# EAGLE board Wall-Switcher (EAGLE 8.4.0)
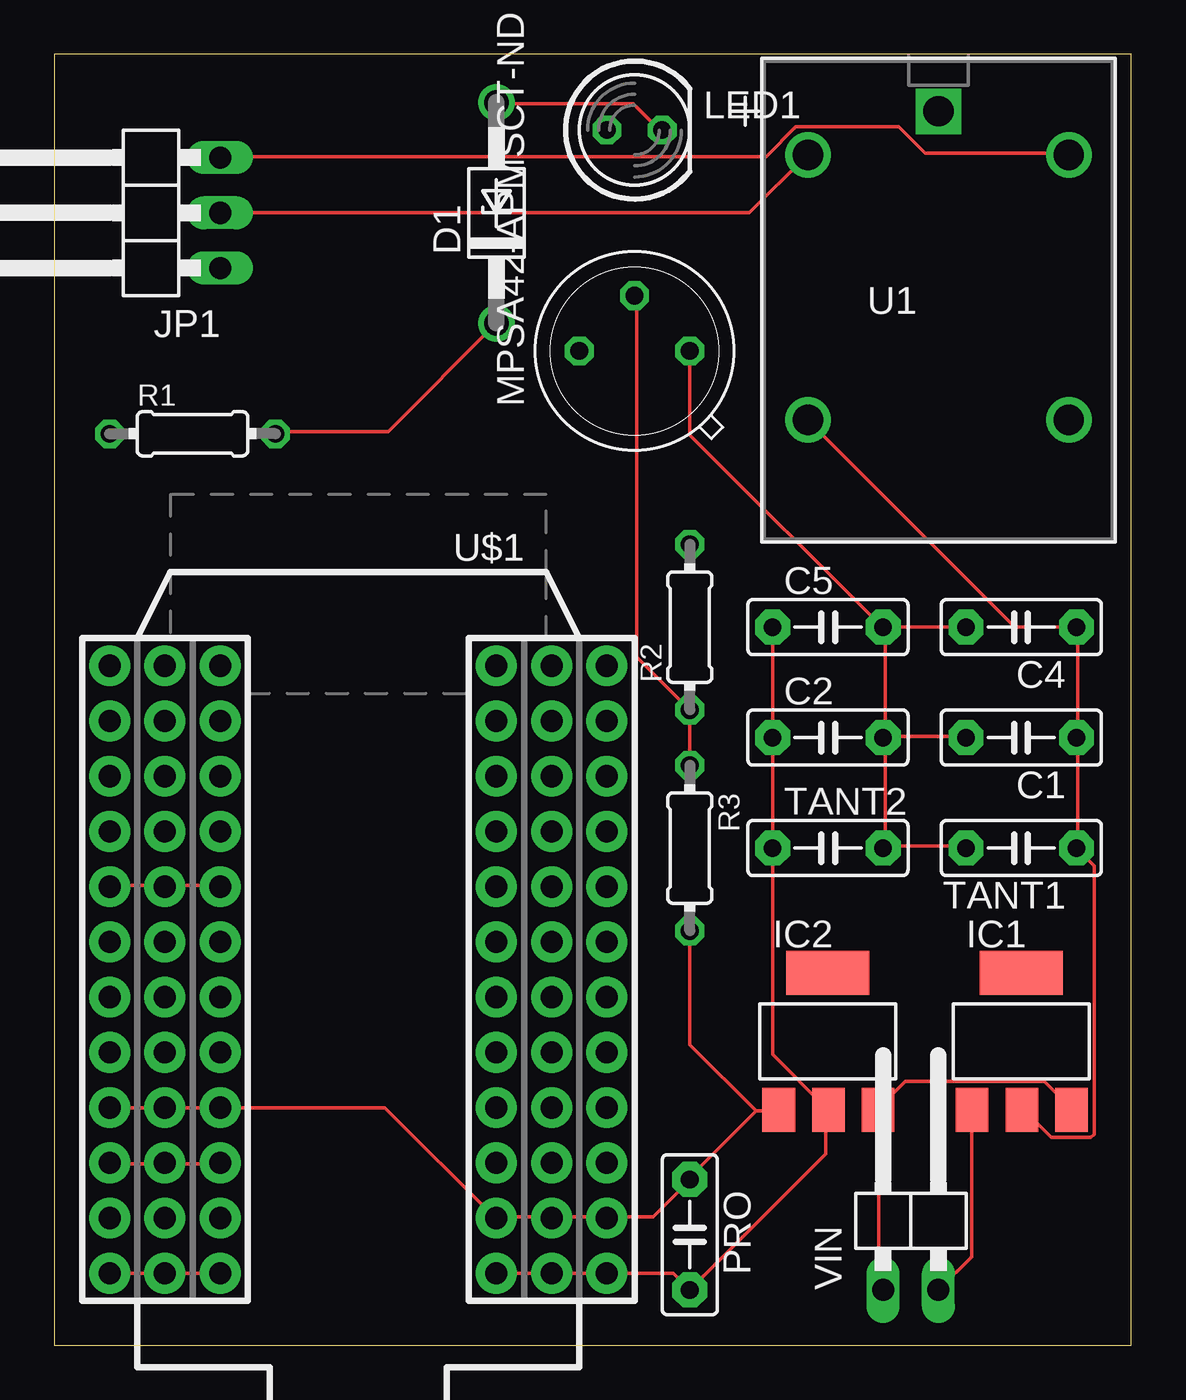
[diagram p0: board, top side]
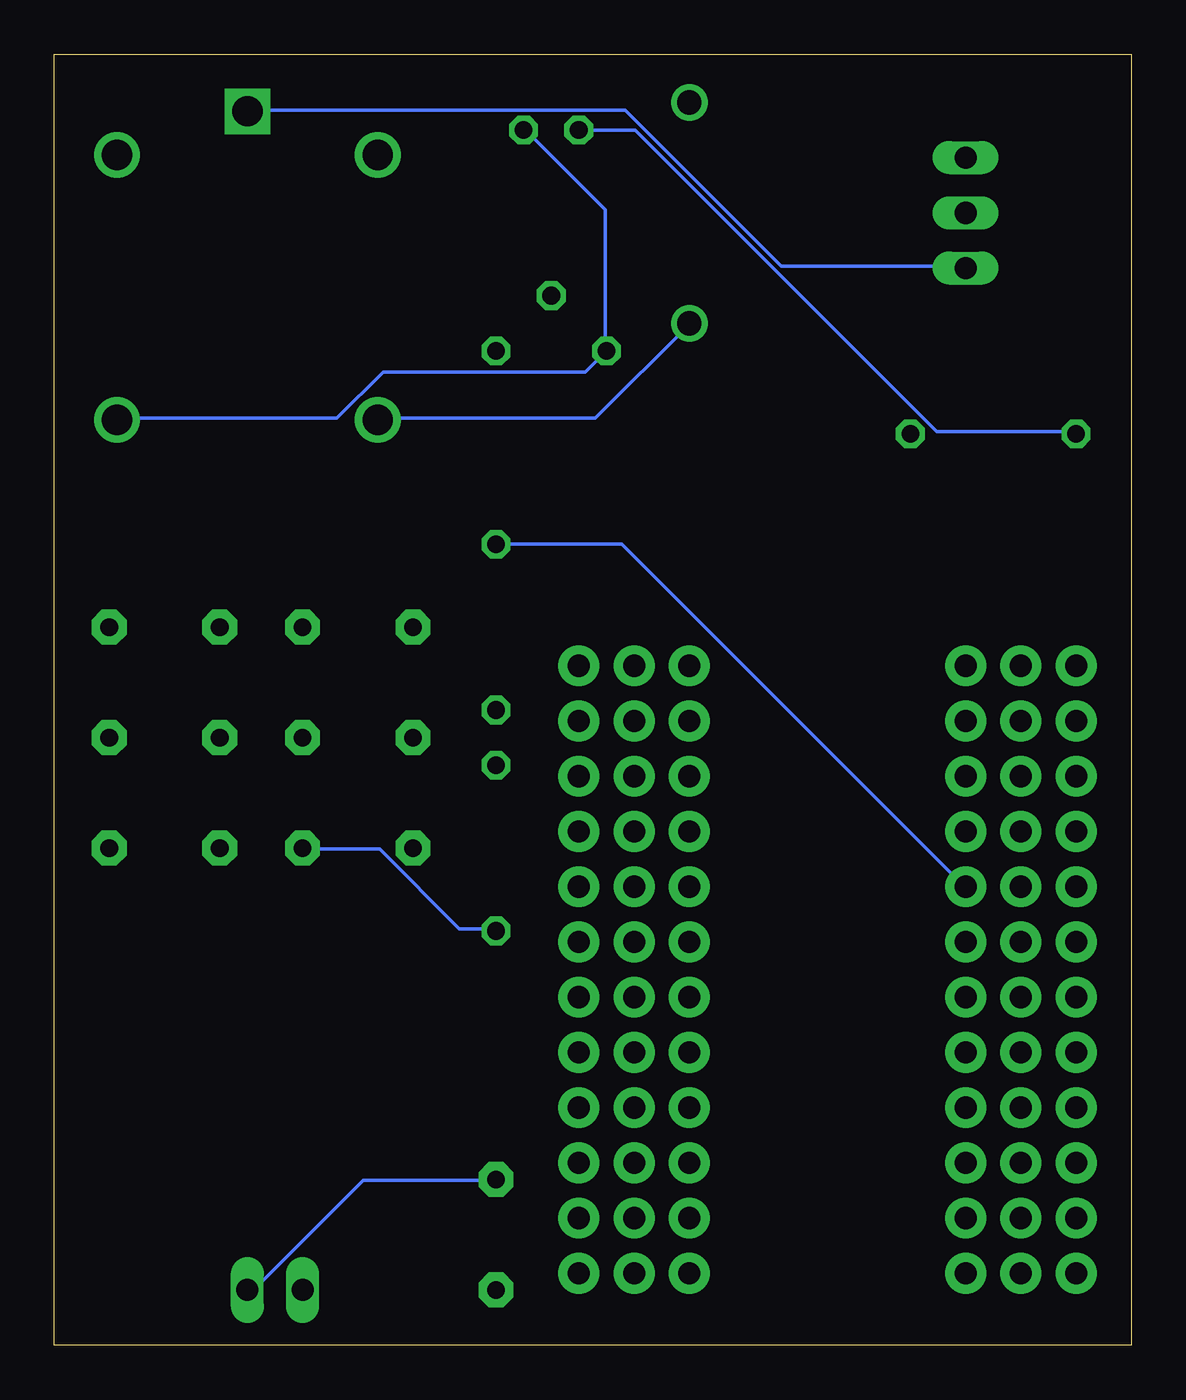
[diagram p1: board, bottom side, seen from below]

Size 49.51 x 59.36 mm. Coordinates in mm from the lower left corner, seen from the top.
Outline: 0,0 49.51,0 49.51,59.36 0,59.36 0,0
Copper layers (1*16): Top 0.035mm / dielectric 1.5mm / Bottom 0.035mm
Design rules "default": minimum track width 6mil, minimum drill 0.35mm, track to track 6mil, track to pad 6mil, pad to pad 6mil, via to via 6mil, smd to smd 6mil, copper to edge 40mil, drill to drill 6mil, minimum pad ring 10mil, minimum via ring 8mil, stop-mask expansion 4mil, vias tented up to drill 0mil, thermal gap 10mil

## Footprints (pad centres in the part's own frame; a part is rotated, then mirrored left to right if it is on the bottom)
C5B2.5 = drill 0.813 pad 1.6 octagon: 1 -2.54,0; 2 2.54,0
DO41Z10 = drill 1.118: A 5.08,0; C -5.08,0
SOT223 = smd 1.499 x 2.007: 1 -2.261,-3.15; 2 0.025,-3.15; 3 2.311,-3.15 | smd 3.81 x 2.007: 4 0,3.15
1X03/90 = drill 1.016 long: 1 -2.54,-3.81; 2 0,-3.81; 3 2.54,-3.81
LED5MM = drill 0.813 octagon: A -1.27,0; K 1.27,0
TO5 = drill 0.813 octagon: 1 0,-2.54; 2 2.54,0; 3 0,2.54
0204/7 = drill 0.813 octagon: 1 -3.81,0; 2 3.81,0
RELAY_JS_1C = drill 1.397 pad 1.905: 1 5.994,15.367; 2 -5.994,3.175; 4 -5.994,15.367; 5 5.994,3.175 | drill 1.397 pad 1.905 square: 3 0,17.374
PHOTON_STACKABLE = drill 1.016 pad 1.88: 1 1.27,32.258; 2 1.27,29.718; 3 1.27,27.178; 4 1.27,24.638; 5 1.27,22.098; 6 1.27,19.558; 7 1.27,17.018; 8 1.27,14.478; 9 1.27,11.938; 10 1.27,9.398; 11 1.27,6.858; 12 1.27,4.318; 13 19.05,4.318; 14 19.05,6.858; 15 19.05,9.398; 16 19.05,11.938; 17 19.05,14.478; 18 19.05,17.018; 19 19.05,19.558; 20 19.05,22.098; 21 19.05,24.638; 22 19.05,27.178; 23 19.05,29.718; 24 19.05,32.258; #1 3.81,32.258; #2 3.81,29.718; #3 3.81,27.178; #4 3.81,24.638; #5 3.81,22.098; #6 3.81,19.558; #7 3.81,17.018; #8 3.81,14.478; #9 3.81,11.938; #10 3.81,9.398; #11 3.81,6.858; #12 3.81,4.318; #13 21.59,4.318; #14 21.59,6.858; #15 21.59,9.398; #16 21.59,11.938; #17 21.59,14.478; #18 21.59,17.018; #19 21.59,19.558; #20 21.59,22.098; #21 21.59,24.638; #22 21.59,27.178; #23 21.59,29.718; #24 21.59,32.258; @1 -1.27,32.258; @2 -1.27,29.718; @3 -1.27,27.178; @4 -1.27,24.638; @5 -1.27,22.098; @6 -1.27,19.558; @7 -1.27,17.018; @8 -1.27,14.478; @9 -1.27,11.938; @10 -1.27,9.398; @11 -1.27,6.858; @12 -1.27,4.318; @13 16.51,4.318; @14 16.51,6.858; @15 16.51,9.398; @16 16.51,11.938; @17 16.51,14.478; @18 16.51,17.018; @19 16.51,19.558; @20 16.51,22.098; @21 16.51,24.638; @22 16.51,27.178; @23 16.51,29.718; @24 16.51,32.258
1X02/90 = drill 1.016 long: 1 -1.27,-3.81; 2 1.27,-3.81

## Placement (x,y rotation side)
C1  .1uf  [C5B2.5]  44.45,27.94 180 top
C2  .1uf  [C5B2.5]  35.56,27.94 0 top
C4  100uf  [C5B2.5]  44.45,33.02 180 top
C5  100uf  [C5B2.5]  35.56,33.02 0 top
D1  1N4728  [DO41Z10]  20.32,52.07 90 top
IC1  REG1117  [SOT223]  44.45,13.97 0 top
IC2  REG1117  [SOT223]  35.56,13.97 0 top
JP1  [1X03/90]  3.81,52.07 90 top
LED1  [LED5MM]  26.67,55.88 0 top
MPSA42-APMSCT-ND  2N1613  [TO5]  26.67,45.72 90 top
PRO  [C5B2.5]  29.21,5.08 270 top
R1  [0204/7]  6.35,41.91 0 top
R2  [0204/7]  29.21,33.02 90 top
R3  [0204/7]  29.21,22.86 270 top
TANT1  [C5B2.5]  44.45,22.86 180 top
TANT2  [C5B2.5]  35.56,22.86 0 top
U1  JS1-5V-F  [RELAY_JS_1C]  40.64,39.37 0 top
U$1  PHOTON_WITH_STACKABLE_HEADERS  [PHOTON_STACKABLE]  24.13,35.56 180 top
VIN  [1X02/90]  39.37,6.35 0 top

## Library data of the parts
C1 C2 C4 C5 PRO TANT1 TANT2 = capacitor-wima
D1 = diode
IC1 IC2 = burr-brown; MPN: REG1117; OC_FARNELL: 1097566; OC_NEWARK: 14P6981
JP1 VIN = pinhead
LED1 = led
MPSA42-APMSCT-ND = transistor
R1-R3 = eagle-ltspice; SPICEMODEL: NONE; SPICEPREFIX: R
U1 = Photon-Power-Relay; MANUFACTURER_PART_NUMBER: JS15VF; VENDOR: Panasonic
U$1 = Spark

## Nets
3V3: U$1.24 U$1.#24 U$1.@24
GND: C1.2 C2.2 C4.2 C5.2 IC1.1 IC2.1 MPSA42-APMSCT-ND.1 PRO.1 R3.2 TANT1.2 TANT2.2 U$1.2 U$1.21 U$1.#2 U$1.#21 U$1.@2 U$1.@21 VIN.2
N$1: D1.A LED1.K MPSA42-APMSCT-ND.3 U1.5
N$2: LED1.A R1.1
N$3: C1.1 C4.1 D1.C IC1.2 R1.2 TANT1.1 U1.2
N$4: R2.2 U$1.17 U$1.#17 U$1.@17
N$5: MPSA42-APMSCT-ND.2 R2.1 R3.1
N$6: C2.1 C5.1 IC2.2 PRO.2 TANT2.1 U$1.1 U$1.#1 U$1.@1
N$7: IC1.3 IC2.3 VIN.1
N$8: JP1.1 U1.3
N$9: JP1.2 U1.4
N$10: JP1.3 U1.1
VBAT: U$1.22 U$1.#22 U$1.@22

## Tracks (layer width: path | path; a pad name or v marks a point on that pad's centre or on a via)
3V3
  Top 0.152: U$1.#24 U$1.24 U$1.@24
GND
  Top 0.152: 38.2,22.96 41.86,22.96 TANT1.2 | 38.2,27.99 41.86,27.99 C1.2 | 38.2,22.96 38.2,27.84 C2.2 38.2,27.99 | 38.2,22.96 TANT2.2 | MPSA42-APMSCT-ND.1 29.21,41.86 38.05,33.02 C5.2 38.2,33.02 | 38.2,33.02 C4.2 | 38.2,33.02 38.2,27.99 | VIN.2 42.16,4.06 42.16,10.77 IC1.1 | U$1.#21 U$1.21 U$1.@21 15.19,10.92 20.22,5.89 U$1.#2 20.37,5.89 22.81,5.89 U$1.2 22.96,5.89 25.4,5.89 | 32.26,10.77 33.17,10.77 IC2.1 | 32.26,10.77 29.21,7.72 PRO.1 29.21,7.57 27.53,5.89 25.4,5.89 | R3.2 29.21,13.82 32.26,10.77 | 25.4,5.89 U$1.@2
  Bottom 0.152: VIN.2 40.33,2.54 35.31,7.57 29.21,7.57 PRO.1 | TANT2.2 38.05,22.81 34.54,22.81 30.89,19.15 29.21,19.15 R3.2
N$1
  Top 0.152: D1.A 20.37,57.1 26.62,57.1 27.84,55.88 LED1.K
  Bottom 0.152: LED1.K 27.84,55.88 24.18,52.22 24.18,45.82 MPSA42-APMSCT-ND.3 25.09,44.75 34.39,44.75 36.52,42.62 46.58,42.62 U1.5
N$2
  Bottom 0.152: LED1.A 22.81,55.88 8.94,42.01 2.54,42.01 R1.1
N$3
  Top 0.152: IC1.2 44.6,10.77 45.82,9.55 47.65,9.55 47.8,9.7 47.8,22.05 TANT1.1 47.04,22.96 47.04,27.84 C1.1 47.04,27.99 47.04,33.02 C4.1 44.14,33.02 34.7,42.47 U1.2 | D1.C 15.34,42.01 10.16,42.01 R1.2
  Bottom 0.152: U1.2 34.54,42.62 24.64,42.62 20.37,46.89 D1.C
N$4
  Top 0.152: U$1.#17 2.54,21.13 4.98,21.13 U$1.17 5.13,21.13 7.57,21.13 U$1.@17
  Bottom 0.152: R2.2 23.42,36.83 7.72,21.13 U$1.@17
N$5
  Top 0.152: R3.1 R2.1 26.77,31.65 26.77,48.26 MPSA42-APMSCT-ND.2
N$6
  Top 0.152: C5.1 C2.1 TANT2.1 33.02,13.36 35.46,10.92 IC2.2 35.46,10.77 35.46,8.79 PRO.2 28.45,3.3 U$1.@1 U$1.1 U$1.#1
N$7
  Top 0.152: VIN.1 38.05,2.54 37.9,2.69 37.9,10.77 IC2.3 37.9,10.92 39.12,12.14 45.52,12.14 46.74,10.92 IC1.3
N$8
  Bottom 0.152: JP1.1 7.72,49.63 16.1,49.63 23.27,56.79 40.64,56.79 U1.3
N$9
  Top 0.152: JP1.2 31.95,52.07 34.54,54.66 U1.4
N$10
  Top 0.152: JP1.3 7.72,54.66 32.71,54.66 34.09,56.03 38.81,56.03 40.03,54.81 46.58,54.81 U1.1
VBAT
  Top 0.152: U$1.#22 2.54,8.33 4.98,8.33 U$1.22 5.13,8.33 7.57,8.33 U$1.@22